# Altium PCB BMS.PcbDoc
Units mil, origin at the board's own origin, x right, y up, seen from the top; angles counter-clockwise.
Board outline 2559.06 x 2165.35 mil, 2 copper layers (Top Layer, Bottom Layer); 67 components, 40 nets, 172 pads, 236 vias.
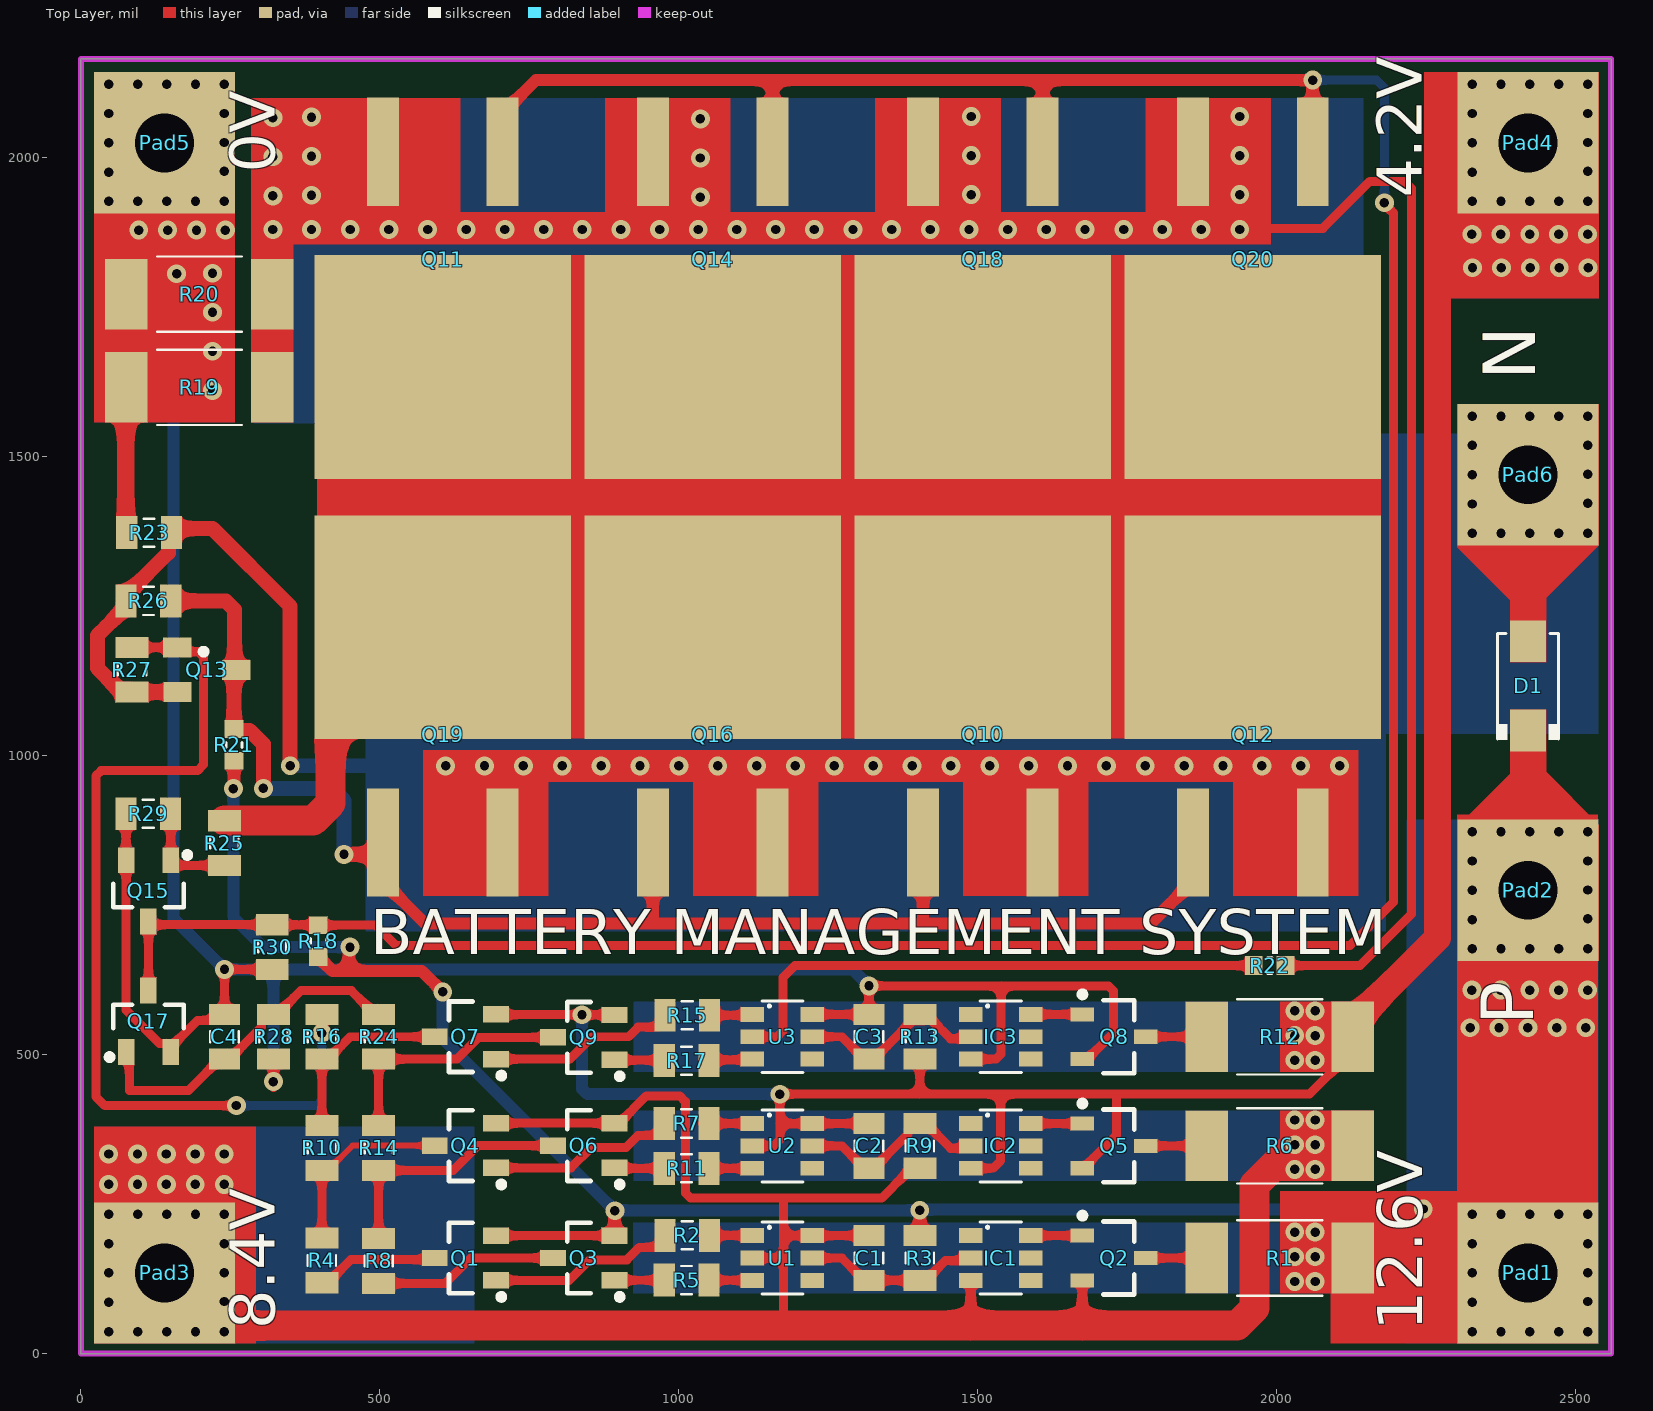
[diagram p0: Top Layer view]
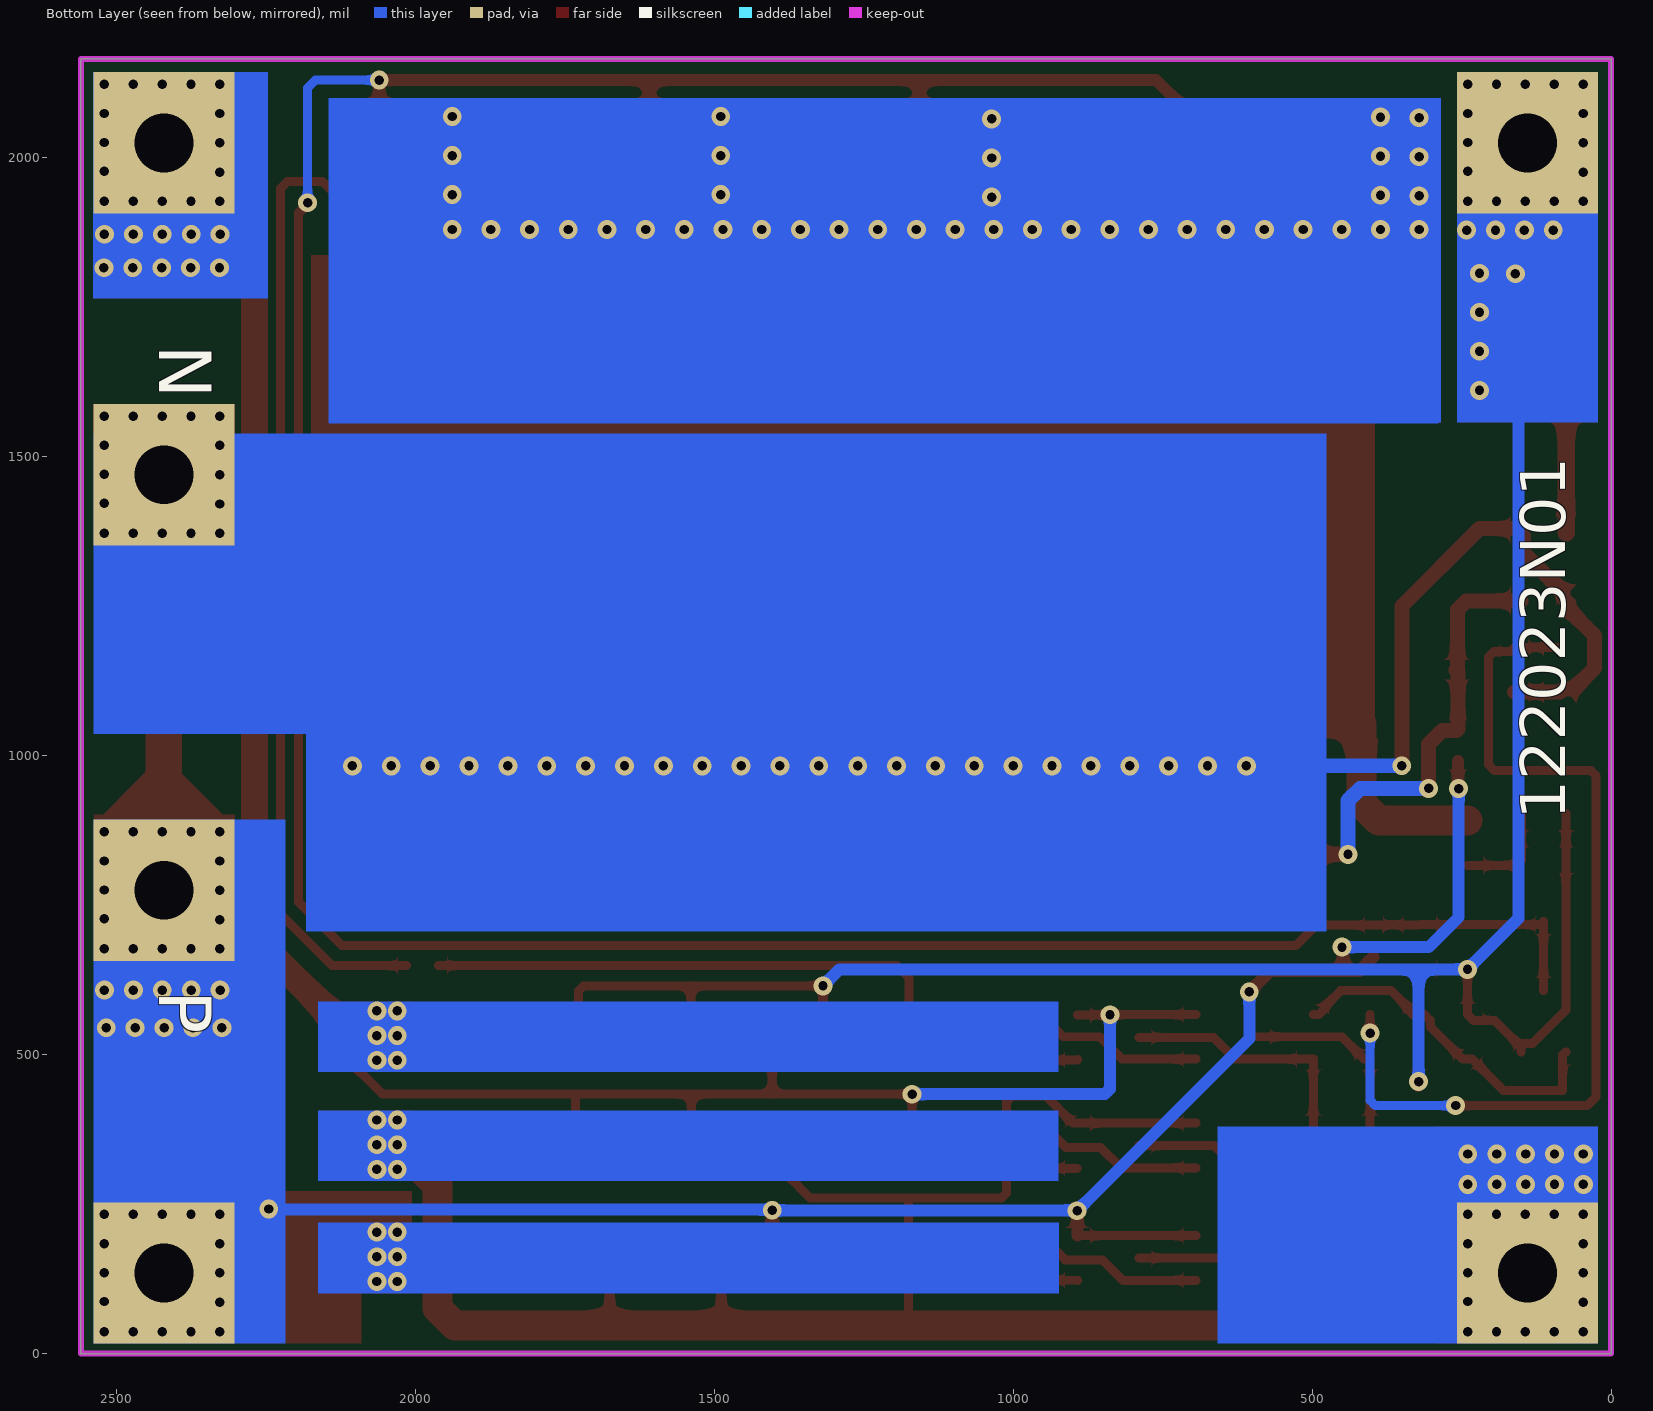
[diagram p1: Bottom Layer view, seen from below]
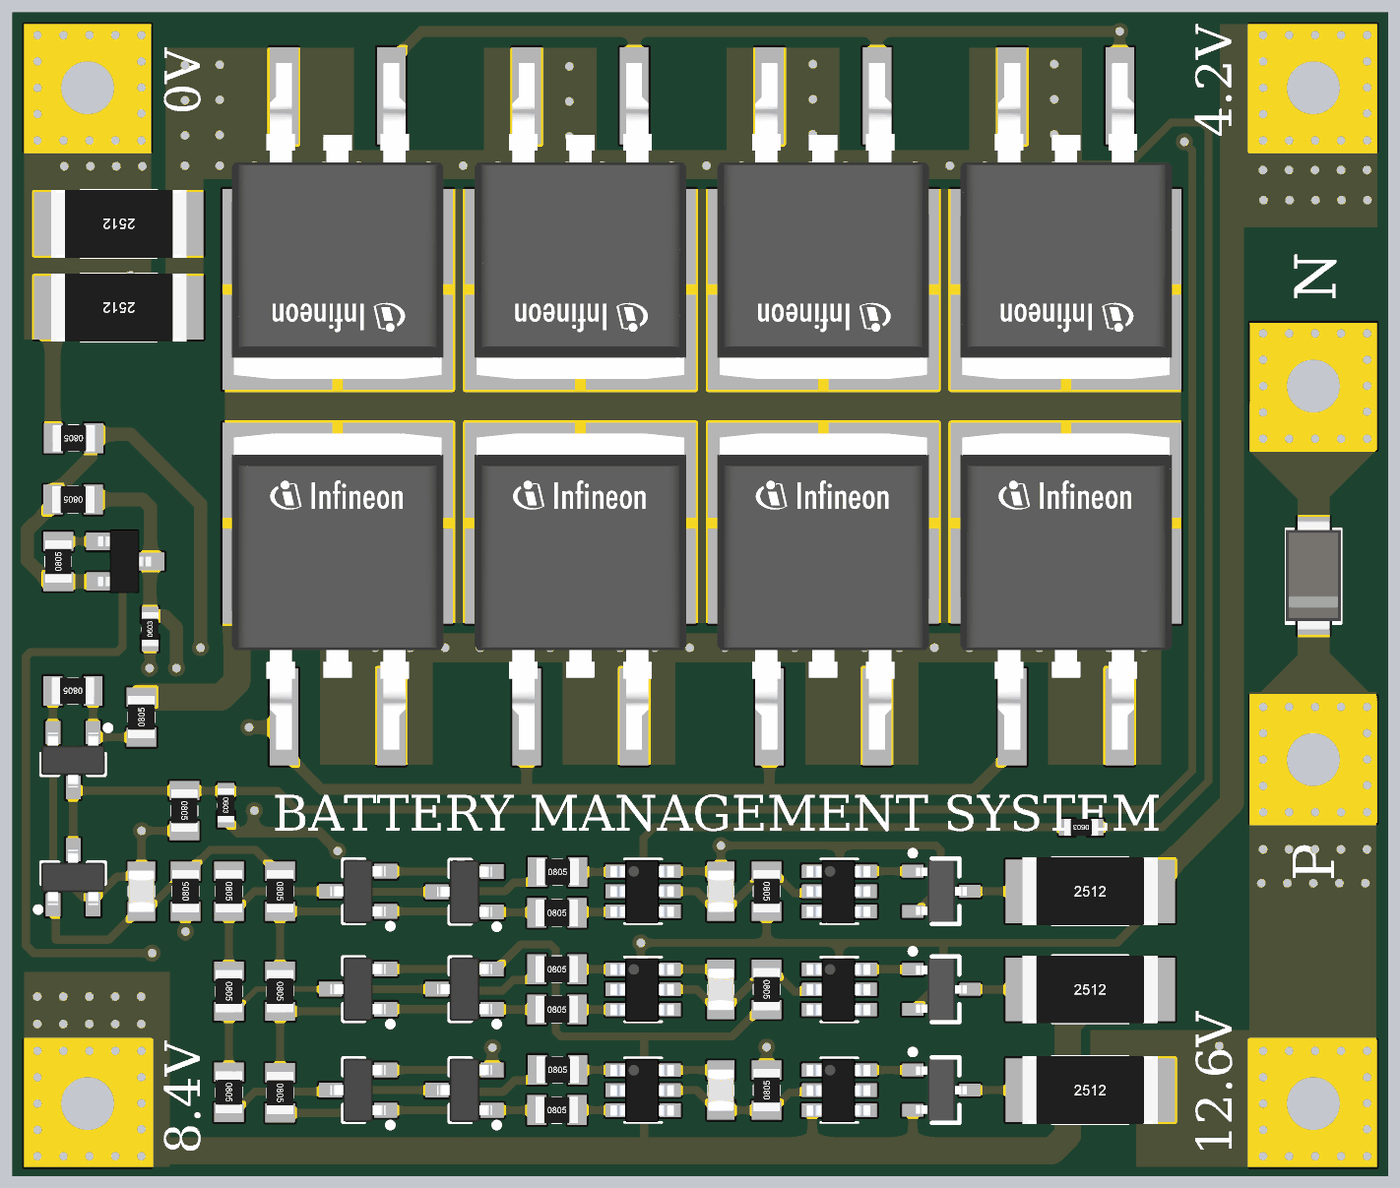
[diagram p2: 3D render of the assembled board from above, using the file's embedded part models]

## Layer stack, top to bottom
Top Solder: solder mask 0.4, Solder Resist, Dk 3.5
Top Layer: signal copper 1.4
Dielectric 1: dielectric 12.6, FR-4, Dk 4.8
Bottom Layer: signal copper 1.4
Bottom Solder: solder mask 0.4, Solder Resist, Dk 3.5

## Board outline
0,0 0,2165.35 2559.06,2165.35 2559.06,0

## Design rules (kind name [scope] priority, off if disabled: settings)
Clearance [All] p1: gap=10 ignorepadtopadclearanceinfootprint=TRUE
PolygonConnect [All] p1: connectstyle=Relief reliefconductorwidth=10 reliefentries=4 polygonreliefangle="90 Angle" airgapwidth=10
RoutingVias [All] p1: holewidth=28 width=50 viastyle="Through Hole" minholewidth=15.75 minwidth=31.5 maxholewidth=28 maxwidth=50
SolderMaskExpansion [All] p1: expansion=4 istentingtop=FALSE
Width [All] p1: maxlimit=100 minlimit=8 preferedwidth=10
30 further rules are at their usual default settings.

## Components (designator, comment, footprint, x,y, rotation, side; value= is the part's Value field where it differs from the comment)
C1 "100nF_0805" "CN-SMD-0805 - H32" 1318,160 r270 top
C2 "100nF_0805" "CN-SMD-0805 - H32" 1318,347.5 r270 top
C3 "100nF_0805" "CN-SMD-0805 - H32" 1318,530 r270 top
C4 "1uF_0805" "CN-SMD-0805 - H50" 240.15,530 r90 top
D1 "1N5822-SS34" SMA 2425,1120 r270 top value=1N5007
IC1 "HY2213_BB3A_SOT236" SOT23-6 1503.75,220.04 r270 top
IC2 "HY2213_BB3A_SOT236" SOT23-6 1503.75,407.54 r270 top
IC3 "HY2213_BB3A_SOT236" SOT23-6 1503.75,590.04 r270 top
Pad1 "Pad_Cell" Pad_cell 2420,135 r0 top
Pad2 "Pad_Cell" Pad_cell 2420,775 r0 top
Pad3 "Pad_Cell" Pad_cell 140,135 r0 top
Pad4 "Pad_Cell" Pad_cell 2420,2025 r0 top
Pad5 "Pad_Cell" Pad_cell 140,2025 r0 top
Pad6 "Pad_Cell" Pad_cell 2420,1470 r0 top
Q1 "PNP_SOT23" SOT23_3 643,160 r180 top
Q2 "A2SHB_SOT23" SOT-23-3L 1728,160 r0 top
Q3 "PNP_SOT23" SOT23_3 841,160 r180 top
Q4 "PNP_SOT23" SOT23_3 643,348 r180 top
Q5 "A2SHB_SOT23" SOT-23-3L 1728,347.5 r0 top
Q6 "PNP_SOT23" SOT23_3 841,348 r180 top
Q7 "PNP_SOT23" SOT23_3 643,530 r180 top
Q8 "A2SHB_SOT23" SOT-23-3L 1728,530 r0 top
Q9 "PNP_SOT23" SOT23_3 841,529 r180 top
Q10 "IRF1404S_DDPAK" TO263-3_DDPAK 1408.33,854.76 r0 top
Q11 "IRF1404S_DDPAK" TO263-3_DDPAK 705,2010.24 r180 top
Q12 "IRF1404S_DDPAK" TO263-3_DDPAK 1860,854.76 r0 top
Q13 "C1815" SOT23B 210.41,1143.73 r270 top
Q14 "IRF1404S_DDPAK" TO263-3_DDPAK 1156.67,2010.24 r180 top
Q15 "NPN_SOT23" SOT23_3 113,774 r270 top
Q16 "IRF1404S_DDPAK" TO263-3_DDPAK 956.67,854.76 r0 top
Q17 "NPN_SOT23" SOT23_3 113,556 r90 top
Q18 "IRF1404S_DDPAK" TO263-3_DDPAK 1608.33,2010.24 r180 top
Q19 "IRF1404S_DDPAK" TO263-3_DDPAK 505,854.76 r0 top
Q20 "IRF1404S_DDPAK" TO263-3_DDPAK 2060,2010.24 r180 top
R1 "470R_2512" RES-SMD-2512 2005,160 r0 top
R2 "10K_0805" RES-SMD-0805 1014,198 r0 top
R3 "100R_0805" RES-SMD-0805 1403.03,160 r90 top
R4 "1M_0805" RES-SMD-0805 403,156 r270 top
R5 "10K_0805" RES-SMD-0805 1013,123 r0 top
R6 "470R_2512" RES-SMD-2512 2005,347.5 r0 top
R7 "10K_0805" RES-SMD-0805 1013,385 r0 top
R8 "1M_0805" RES-SMD-0805 498,155 r270 top
R9 "100R_0805" RES-SMD-0805 1403.03,347.5 r270 top
R10 "1M_0805" RES-SMD-0805 403,344 r270 top
R11 "10K_0805" RES-SMD-0805 1013,310 r0 top
R12 "470R_2512" RES-SMD-2512 2005,530 r0 top
R13 "100R_0805" RES-SMD-0805 1403.03,530 r270 top
R14 "1M_0805" RES-SMD-0805 498,344 r270 top
R15 "10K_0805" RES-SMD-0805 1014,566 r0 top
R16 "1M_0805" RES-SMD-0805 403,530 r270 top
R17 "10K_0805" RES-SMD-0805 1013,490 r0 top
R18 "33K_0603" RES-SMD-0603 397,690 r270 top
R19 "R020_2512" RES-SMD-2512 198,1616 r180 top
R20 "R020_2512" RES-SMD-2512 198,1772 r180 top
R21 "33K_0603" RES-SMD-0603 256,1018 r90 top
R22 "1K_0603" RES-SMD-0603 1988,649 r180 top
R23 "100K_0805" RES-SMD-0805 114,1373 r180 top
R24 "1M_0805" RES-SMD-0805 498,530 r270 top
R25 "1M_0805" RES-SMD-0805 240,854 r90 top
R26 "1M_0805" RES-SMD-0805 112.97,1258.91 r180 top
R27 "1M_0805" RES-SMD-0805 85.41,1143.73 r90 top
R28 "1M_0805" RES-SMD-0805 322.15,530 r90 top
R29 "1M_0805" RES-SMD-0805 112.6,903 r180 top
R30 "1M_0805" RES-SMD-0805 320,680 r270 top
U1 "DW01_SOT236" SOT23-6 1138.75,220.04 r270 top
U2 "DW01_SOT236" SOT23-6 1138.75,407.54 r270 top
U3 "DW01_SOT236" SOT23-6 1138.75,590.04 r270 top

## Footprints (in the part's own frame and the unit in brackets; to place one, negate y for a bottom-side part, rotate by r counter-clockwise, add the part's x,y. Pads: shape width x height; smd on the part's side, far side on the other; paste and mask are expansions set on the pad)
"CN-SMD-0805 - H32" [mm]
  rect 0.9x1.3 smd: 1(-0.95,0) 2(0.95,0)
  silkscreen extent -0.23,-0.6 0.23,0.6, body extent -1,-0.63 1,0.63, height 0.81
"CN-SMD-0805 - H50" [mm]
  rect 0.9x1.3 smd: 1(-0.95,0) 2(0.95,0)
  silkscreen extent -0.23,-0.6 0.23,0.6, body extent -1,-0.63 1,0.63, height 1.26
Pad_cell [mm]
  rect 6x6 hole 2.5: 1(0,0)
RES-SMD-0603 [mm]
  rect 0.75x0.8 smd: 1(-0.675,0) 2(0.675,0)
  silkscreen extent -0.1,-0.34 0.1,0.34, body extent -0.8,-0.4 0.8,0.4, height 0.43
RES-SMD-0805 [mm]
  rect 0.9x1.4 smd: 1(-0.95,0) 2(0.95,0)
  silkscreen extent -0.23,-0.6 0.23,0.6, body extent -1,-0.63 1,0.63, height 0.6
RES-SMD-2512 [mm] "Chip Capacitor, Body 3.2x2.5mm, IPC Medium Density"
  rect 1.8x3 smd: 1(-3.1,0) 2(3.1,0)
  silkscreen extent -1.8,-1.6 1.8,1.6, body extent -3.2,-1.6 3.2,1.6, height 0.6
SMA [mil]
  rect 70x60 smd: 1(-71.57,-4.72) 2(78.03,-4.72)
  silkscreen extent -85,-56 94,47, body extent -100,-56 105,46, height 95
SOT23-6 [mm]
  rect 0.635x1 smd: 1(0.575,-0.4) 2(1.525,-0.4) 3(2.475,-0.4) 4(2.475,2.15) 5(1.525,2.15) 6(0.575,2.15)
  silkscreen extent 0,0 3.05,1.75, body extent 0.04,-0.67 3.04,2.33, height 1.3
SOT23_3 [mm] "SOT23, 3-Leads, Body 2,90x2,30mm, Pitch 0,95mm, IPC Medium Density"
  rect 1.1x0.7 smd: 1(-1.3,0.95) 2(-1.3,-0.95) 3(1.3,0)
  silkscreen extent -1.65,-1.5 0.7,1.78, body extent -1.3,-1.5 1.3,1.5, height 1.1
SOT23B [mm] "SOT 23B"
  rect 0.85x1.2 smd: 1(0.94,-1.245) 2(0,1.25) 3(-0.95,-1.25)
  silkscreen extent -0.9,-0.26 -0.65,-0.01, body extent -1.5,-1.3 1.5,1.2, height 1.06
SOT-23-3L [mm]
  rect 1x0.6 smd: 1(-1.35,0.95) 2(1.35,0) 3(-1.35,-0.95)
  silkscreen extent -1.47,-1.55 0.85,1.92, body extent -1.2,-1.45 1.2,1.45, height 1
TO263-3_DDPAK [mm]
  rect 1.35x4.6 smd: 1(0,0) 3(5.08,0)
  rect 10.9x9.5 smd paste-2539.97: 2(2.54,9.15)
  body extent -2.46,-1.56 7.54,13.39, height 4.41

## Part data
C1 C2 C3: library part "CAP 0805 104", "Cap SMD, 0.08x0.05 inch, 2.0x1.2 mm - 2012"
C4: library part "CAP 0805 105", "Cap SMD, 0.08x0.05 inch, 2.0x1.2 mm - 2012"
D1: library part "Diode 1N5822 SS34", "Schottky diode, 3A, VRRM 40V", Code - JEDEC=DO-214-AB, Published=8-Jun-2000, Publisher="Altium Limited", Revision="July-2002: Re-released for DXP Platform."
IC1 IC2 IC3: library part HY2213, "1  Cell  Li-ion/Polymer  Battery  Charge  Balance  IC"
Pad1 Pad2 Pad3 Pad4 Pad5 Pad6: library part Pad_cell
Q1 Q3 Q4 Q6 Q7 Q9: library part MMBT5401, "Transistor SMD MMBT5401 PNP 150V - SOT23"
Q2 Q5 Q8: library part HNM2302ALB, "N-Channel / Enhancement Mode / Field Effect Transistor"
Q10 Q11 Q12 Q14 Q16 Q18 Q19 Q20: library part IRF1404S, "IRF1404S TO263 MOSFET N-CH 162A 40V"
Q13: library part "Transistor C1815", "NPN 600mW, ECB"
Q15 Q17: library part MMBT5551, "2N5551 MMBT5551 G1 NPN Transistor 0.6A 160V SOT-23"
R1 R6 R12: library part "RES 2512 470R", "Resistor SMD, 0.25x0.12 inch, 6.3x3.2 mm - 6332, 1W"
R2 R5 R7 R11 R15 R17: library part "RES 0805 10K", "Resistor SMD, 0.08x0.05 inch, 2.0x1.2 mm - 2012, 1/8W"
R3 R9 R13: library part "RES 0805 100R", "Resistor SMD, 0.08x0.05 inch, 2.0x1.2 mm - 2012, 1/8W"
R4 R8 R10 R14 R16 R24 R25 R26 R27 R28 R29 R30: library part "RES 0805 1M", "Resistor SMD, 0.08x0.05 inch, 2.0x1.2 mm - 2012, 1/8W"
R18 R21: library part "RES 0603 33K", "Resistor SMD, 0.06x0.03 inch, 1.55x0.85 mm - 1608, 1/10W"
R19 R20: library part "RES 2512 0.02R", "Resistor SMD, 0.25x0.12 inch, 6.3x3.2 mm - 6332, 1W"
R22: library part "RES 0603 1K", "Resistor SMD, 0.06x0.03 inch, 1.55x0.85 mm - 1608, 1/10W"
R23: library part "RES 0805 100K", "Resistor SMD, 0.08x0.05 inch, 2.0x1.2 mm - 2012, 1/8W"
U1 U2 U3: library part DW01, "One Cell Lithium-ion/Polymer Battery Protection IC"

## Via types
v1: diameter 31.5, hole 15.75, Top Layer to Bottom Layer, tented both sides, 236 vias

## Nets (pads, with @x,y where several pads share a name; then routed paths per layer and width w, separated by ;. In a path a pad name is that pad's centre, name@x,y a point inside that pad or via, vN(x,y) a via of type N, cw(c..) or ccw(c..) an arc to the next point about the centre after c; other vN are vias at no path point)
0V: C3.1 C4.2 IC3.3 Pad5.1 Q8.3 Q15.2 Q17.2 R19.2 R20.2 R23.2 R28.1 R29.2 R30.2 U3.6 | length 4713.6
  Top Layer w15: R29.2 75.4,902.8 75.4,825.38 Q15.2 75.6,574.4 131.03,518.97 144.12,518.97 Q17.2@150.4,512.69 ; R19.2 151.4,1616 ; Q17.2 Q17.2@150.4,512.69 ; R30.2 247.77,642.6 244.54,639.37 244.54,638.25 240.15,633.85 C4.2 229.93,557.18 194.89,557.18 Q17.2@150.4,512.69 ; v1@322,445 322.15,445.15 R28.1 ; U3.6 C3.1 v1(1318,615) 1539,615 ; IC3.3 1530.21,492.6 1539,501.39 1539,615 ; Q8.3@1666.98,492.6 Q8.3 1682.72,492.6 1727,536.87 1727,606.21 1718.21,615 1539,615
  Top Layer w30: R23.2@75,1373 75,1772 75,1775.71 149.32,1850.03 ; 151.4,1616 151.4,1797.4 v1(160,1806)
  Bottom Layer w20: v1(220,1611) 201.56,1611 155,1564.44 155,727.75 v1(240.15,642.6) 322,642.6 ; v1(322,455) 322,642.6 ; v1(1318,615) 1290.4,642.6 322,642.6
  other v1: 220,1676.33 220,1741.67 220,1807 96.66,1879 145,1879 193.34,1879 241.69,1879 46.63,1927 94.97,1927 143.31,1927 191.66,1927 240,1927 46.63,1976 240,1977.25 46.63,2025 240,2025.5 46.63,2074 240,2074 46.63,2123 94.97,2123 143.31,2123 191.66,2123 240,2123
4.2V: C2.1 IC2.3 Pad4.1 Q5.3 Q7.2 Q9.2 R12.2 R13.2 U2.2 U2.6 | length 3947.5
  Top Layer w15: Q7.2 694.68,566.9 v1(838,566.9) 838.25,566.65 891.93,566.65 Q9.2 ; U2.2 1158.5,347.5 1169,358 1169,384.9 ; C2.1@1325.87,384.9 C2.1 U2.6 1169,384.9 ; R13.2 1403.03,434 ; IC2.3 1525.45,310.1 1538.12,322.77 1538.12,434 ; Q5.3@1666.98,310.1 Q5.3 1676.35,310.1 1732,365.75 1732,431.56 ; R12.2@2127.05,553.62 R12.2 2127.05,506.38 2054.67,434 1538.12,434 ; 1169,384.9 v1(1169,434) 1403.03,434 ; 1403.03,434 1538.12,434
  Top Layer w45: R12.2@2127.05,553.62 2268.84,695.41 2268.84,1873.84 Pad4.1
  Bottom Layer w20: v1(838,566.9) 838,442.79 846.79,434 v1(1169,434)
  other v1: 2030,490.66 2064,490.66 2030,532 2064,532 2030,573.34 2064,573.34 2327.31,1816 2375.66,1816 2424,1816 2472.34,1816 2520.69,1816 2326.31,1872 2374.66,1872 2423,1872 2471.34,1872 2519.69,1872 2326.63,1927 2374.97,1927 2423.31,1927 2471.66,1927 2520,1927 2326.63,1976 2520,1977.25 2326.63,2025 2520,2025.5 2326.63,2074 2520,2074 2326.63,2123 2374.97,2123 2423.31,2123 2471.66,2123 2520,2123
8.4V: C1.1 IC1.3 Pad3.1 Q2.3 Q4.2 Q6.2 R6.2 R9.2 U1.2 U1.6 | length 3740.4
  Top Layer w15: Q4.2 Q6.2 900.06,385.4 945.65,431 1001.21,431 1010.82,421.4 1010.82,268.79 1019.6,260 1176,260 ; U1.2 1175.19,160 ; 1159.92,40 1166.92,47 1175.19,55.27 1175.19,160 ; C1.1 U1.6 1175.19,197.4 ; R9.2 1392.82,299.88 1378.82,299.88 1338.94,260 1176,260 ; 1488,40 1488,47 IC1.3 ; 1674.85,40 1674.85,47 Q2.3 ; 1175.19,160 1175.19,197.4 ; 1175.19,197.4 1175.19,259.19 1176,260
  Top Layer w50: Pad3.1 228,47 240,47 1166.92,47 1488,47 1674.85,47 1933.71,47 1963,76.29 1963,282.5 v1(2030,349.5) ; 2064,325.16 2086.34,347.5 R6.2
  other v1: 46.63,37 94.97,37 143.31,37 191.66,37 240,37 46.63,86 240,87.25 46.63,135 240,135.5 46.63,184 240,184 46.63,233 94.97,233 143.31,233 191.66,233 240,233 46.31,283 94.66,283 143,283 191.34,283 239.69,283 2030,308.16 2064,308.16 46.31,334 94.66,334 143,334 191.34,334 239.69,334 2064,349.5 2030,390.84 2064,390.84
12.6V: D1.2 Pad1.1 Pad2.1 Q1.2 Q3.2 R1.2 R3.2 R18.2 R21.1 | length 3038
  Top Layer w15: Q1.2 Q3.2
  Top Layer w20: v1(255,945) 256,946 R21.1 ; R18.2 397.98,663.43 402.75,658.66 402.75,657.68 420.42,640 448.09,640 ; v1(450,680) 448.09,678.09 448.09,640 ; v1(605,605) 570,640 448.09,640 ; Q3.2 892.59,197.81 892.59,238.59 v1(893,239) ; R3.2 v1(1403,240) ; R1.2 2127.05,183.62 2152.48,209.06 2212.06,209.06 v1(2245,242)
  Bottom Layer w20: v1(255,945) 255,730 305,680 v1(450,680) ; v1(605,605) 605,527 v1(893,239) 893.5,239.5 1402.5,239.5 v1(1403,240) 1404,241 2244,241 v1(2245,242)
  other v1: 2326.63,37 2374.97,37 2423.31,37 2471.66,37 2520,37 2326.63,86 2520,87.25 2030,120.66 2064,120.66 2326.63,135 2520,135.5 2030,162 2064,162 2326.63,184 2520,184 2030,203.34 2064,203.34 2326.63,233 2374.97,233 2423.31,233 2471.66,233 2520,233 2323.31,545 2371.66,545 2420,545 2468.34,545 2516.69,545 2326.31,608 2374.66,608 2423,608 2471.34,608 2519.69,608 2326.63,677 2374.97,677 2423.31,677 2471.66,677 2520,677 2326.63,726 2520,727.25 2326.63,775 2520,775.5 2326.63,824 2520,824 2326.63,873 2374.97,873 2423.31,873 2471.66,873 2520,873
NetC1_2: C1.2 IC1.2 R3.1 U1.5 | length 295.6
  Top Layer w15: U1.5 1272.72,160 1310.13,122.6 C1.2 R3.1 1412.87,122.6 1445.81,155.54 1483.54,155.54 IC1.2
NetC2_2: C2.2 IC2.2 R9.1 U2.5 | length 330.6
  Top Layer w15: U2.5 1272.72,347.5 1310.13,310.1 C2.2 C2.2@1325.87,310.1 ; C2.2@1326.1,310.1 1326.1,310.32 1336.09,320.32 1336.32,320.32 1382.97,366.97 1382.97,374.68 1388.41,380.12 1417.66,380.12 1454.6,343.17 1483.68,343.17 IC2.2
NetC3_2: C3.2 IC3.2 R13.1 U3.5 | length 331.3
  Top Layer w15: U3.5 1272.72,530 1310.13,492.6 1325.87,492.6 1389.53,556.25 R13.1@1409.41,556.25 ; R13.1 1413.25,557.18 1423.82,557.18 1454.6,526.4 1484.4,526.4 IC3.2
NetC4_1: C4.1 Q17.1 R24.1 R28.2 | length 580.2
  Top Layer w15: Q17.1 81,499.42 81,440 179.68,440 232.27,492.6 C4.1 248.02,492.6 302.09,546.67 302.09,557.18 312.31,567.4 331.99,567.4 342.21,577.62 342.21,581.39 367.81,607 452.34,607 477.94,581.39 477.94,577.62 488.16,567.4 R24.1
NetD1_1: D1.1 Pad6.1 Q10.3 Q12.3 Q13.1 Q16.3 Q19.3 R23.1 R26.2 R27.1 | length 1213.3
  Top Layer w25: R27.1@85.21,1106.53 161.21,1106.53 Q13.1 ; R27.1 80.19,1111.55 62.64,1111.55 27.5,1146.69 27.5,1201.17 42.14,1215.82 42.32,1215.82 70.35,1243.85 70.35,1253.69 80.78,1264.13 80.78,1273.97 146.18,1339.37 146.18,1367.78 R23.1 158.4,1380 220,1380 350,1250 v1(350,983.25)
  Bottom Layer w15: v1@607,980 v1(610,983)
  Bottom Layer w25: v1(350,983.25) 603.75,983.25 v1@607,980
  other v1: 675,983 740,983 805,983 870,983 935,983 1000,983 1065,983 1130,983 1195,983 1260,983 1325,983 1390,983 1455,983 1520,983 1585,983 1650,983 1715,983 1780,983 1845,983 1910,983 1975,983 2040,983 2105,983 2326.63,1372 2374.97,1372 2423.31,1372 2471.66,1372 2520,1372 2326.63,1421 2520,1422.25 2326.63,1470 2520,1470.5 2326.63,1519 2520,1519 2326.63,1568 2374.97,1568 2423.31,1568 2471.66,1568 2520,1568
NetIC1_6: IC1.6 Q2.1 | length 86.5
  Top Layer w15: IC1.6 Q2.1
NetIC2_6: IC2.6 Q5.1 | length 86.5
  Top Layer w15: IC2.6 Q5.1
NetIC3_6: IC3.6 Q8.1 | length 86.5
  Top Layer w15: IC3.6 Q8.1
NetQ1_1: Q1.1 R2.1 | length 319.4
  Top Layer w15: Q1.1 816.6,122.6 851,157 913,157 933.94,177.94 966.38,177.94 976.6,188.16 R2.1
NetQ1_3: Q1.3 R4.2 | length 206
  Top Layer w15: R4.2 412.84,118.6 451.43,157.18 589,157.18 Q1.3
NetQ2_2: Q2.2 R1.1 | length 101.8
  Top Layer w15: Q2.2 R1.1
NetQ3_1: Q3.1 R5.1 | length 87.4
  Top Layer w15: Q3.1 892.38,122.8 R5.1@979.22,122.8 ; R5.1@986.22,122.8 R5.1@986.43,123
NetQ3_3: Q3.3 R8.2 | length 309.4
  Top Layer w15: R8.2 609.6,117.6 652,160 Q3.3
NetQ4_1: Q4.1 R7.1 | length 318
  Top Layer w15: Q4.1 819.6,310.6 854,345 911.96,345 931.9,364.94 965.38,364.94 975.6,375.16 R7.1
NetQ4_3: Q4.3 R4.1 R10.2 | length 319.2
  Top Layer w10: R10.2 412.84,306.6 454.25,348 Q4.3
  Top Layer w15: R4.1 R10.2
NetQ5_2: Q5.2 R6.1 | length 101.8
  Top Layer w15: Q5.2 R6.1
NetQ6_1: Q6.1 R11.1 | length 82.8
  Top Layer w15: Q6.1@892.78,310 R11.1
NetQ6_3: Q6.3 R8.1 R14.2 | length 428.2
  Top Layer w15: R8.1@498,187.4 R8.1 R14.2 622.6,306.6 664,348 Q6.3
NetQ7_1: Q7.1 R15.1 | length 318.2
  Top Layer w15: Q7.1 817.6,492.6 855,530 915.96,530 931.9,545.94 966.38,545.94 976.34,555.9 R15.1@976.34,565.74
NetQ7_3: Q7.3 R10.1 R16.2 | length 315.5
  Top Layer w15: R10.1 R16.2 412.84,492.6 450.25,530 Q7.3
NetQ8_2: Q8.2 R12.1 | length 101.8
  Top Layer w15: Q8.2 R12.1
NetQ9_1: Q9.1 R17.1 | length 87.9
  Top Layer w15: Q9.1 892.98,490.8 R17.1@978.63,490.8 ; R17.1@985.63,490.8 R17.1@986.43,490
NetQ9_3: Q9.3 R14.1 R24.2 | length 418.1
  Top Layer w15: R14.1 R24.2 628.6,492.6 665,529 Q9.3
NetQ10_1: Q10.1 Q12.1 Q13.2 Q16.1 Q19.1 R21.2 R26.1 | length 2563.2
  Top Layer w15: 953.98,719.5 956.48,719.5 956.67,719.69 ; Q12.1@1860,790.79 Q12.1
  Top Layer w20: Q19.1 505,835 521.58,818.43 521.58,773.42 575.31,719.69 956.67,719.69 Q16.1 ; 956.67,719.5 1408.33,719.5 1788.71,719.5 Q12.1@1860,790.79 ; 1408.33,719.69 Q10.1
  Top Layer w25: R26.1 242.32,1258.91 256.96,1244.26 256.96,1146.39 Q13.2 256,1140.11 R21.2 258.26,1042.31 282.21,1042.31 305,1019.52 305,945.28 v1(305.28,945.28) ; v1(440,835) 503.11,835 Q19.1@505,833.11
  Bottom Layer w25: v1(305.28,945.28) 305.28,945 420,945 440,925 v1(440,835)
NetQ10_2: Q10.2 Q11.2 Q12.2 Q14.2 Q16.2 Q18.2 Q19.2 Q20.2 R25.2 | length 819.2
  Top Layer w50: R25.2 388.39,891.4 417.68,920.69 417.68,1052.99 579.69,1215 726.35,1215 Q19.2
NetQ11_1: Q11.1 Q14.1 Q15.3 Q17.3 Q18.1 Q20.1 R18.1 R30.1 | length 5537.9
  Top Layer w15: Q17.3 Q15.3@113,721.18 ; Q15.3 Q15.3@113,721.18 ; R18.1 396.59,716.99 320.41,716.99 R30.1 116.78,717.4 Q15.3@113,721.18 ; R18.1@397.98,716.57 493.43,716.57 527.75,682.25 2122.25,682.25 2195,755 2195,1907.71 2180,1922.71 v1(2180,1924.75)
  Top Layer w20: Q11.1 705,2074.21 760.79,2130 1156.67,2130 ; Q14.1 1156.67,2130 ; Q18.1 1608.33,2130 ; Q20.1 v1(2060,2130) 1608.33,2130 ; 1156.67,2130 1608.33,2130
  Bottom Layer w15: v1(2060,2130) 2167,2130 2180,2117 v1(2180,1924.75)
NetQ11_3: Q11.3 Q14.3 Q18.3 Q20.3 R19.1 R20.1 R22.1 | length 2506.3
  Top Layer w15: Q20.3 1869,2001.24 1869,1890 1870,1889 1938,1889 1945,1882 2077.17,1882 2155.67,1960.5 2213.28,1960.5 2225,1948.78 2225,735 2139,649 R22.1
  Top Layer w60: R19.1 R20.1 320.05,1925.05 405.15,2010.15 Q11.3@501.58,2010.15
  other v1: 321,1880 385.68,1880 450.36,1880 515.04,1880 579.72,1880 644.4,1880 709.08,1880 773.76,1880 838.44,1880 903.12,1880 967.8,1880 1032.48,1880 1097.16,1880 1161.84,1880 1226.52,1880 1291.2,1880 1355.88,1880 1420.56,1880 1485.24,1880 1549.92,1880 1614.6,1880 1679.28,1880 1743.96,1880 1808.64,1880 1873.32,1880 1938,1880 1036,1934.33 321,1936.33 385.68,1937.33 1489,1938.33 1938,1938.33 1036,1999.67 321,2001.67 385.68,2002.67 1489,2003.67 1938,2003.67 1036,2065 321,2067 385.68,2068 1489,2069 1938,2069
NetQ13_3: Q13.3 R16.1 R27.2 | length 1561.8
  Top Layer w15: R27.2 Q13.3 168.35,1173.98 196.21,1173.98 205,1165.19 205,985 195,975 33.79,975 25,966.21 25,430 40,415 v1(260,415) ; v1(403,536.06) R16.1
  Bottom Layer w15: v1(260,415) 394.21,415 403,423.79 v1(403,536.06)
NetQ15_1: Q15.1 R25.1 R29.1 | length 161.3
  Top Layer w15: R29.1 150.2,902.8 150.2,825.38 Q15.1 ; Q15.1@156.68,816.6 R25.1
NetR2_2: R2.2 U1.1 | length 82.7
  Top Layer w15: R2.2@1040.57,198 1040.87,197.7 1122.7,197.7 U1.1
NetR5_2: R5.2 U1.3 | length 83.6
  Top Layer w15: R5.2@1039.57,123 1039.78,122.8 1122.8,122.8 U1.3
NetR7_2: R7.2 U2.1 | length 83.5
  Top Layer w15: R7.2@1039.58,385 1039.62,384.95 1122.95,384.95 U2.1
NetR11_2: R11.2 U2.3 | length 71.9
  Top Layer w15: R11.2@1039.57,300 R11.2@1039.62,300.05 ; R11.2 U2.3@1122.26,310
NetR15_2: R15.2 U3.1 | length 83
  Top Layer w15: R15.2@1040.57,566 1121.6,566 U3.1
NetR17_2: R17.2 U3.3 | length 84.5
  Top Layer w15: R17.2@1039.57,490 1040.87,491.3 1121.7,491.3 U3.3
NetR22_2: R22.2 U3.2 | length 940
  Top Layer w15: U3.2 1164.21,530 1174,539.79 1174,629 1194,649 R22.2
pads on no net: IC1.1 IC1.4 IC1.5 IC2.1 IC2.4 IC2.5 IC3.1 IC3.4 IC3.5 U1.4 U2.4 U3.4

## Keep-outs
Keep-Out Layer:
  the board outline again, w10

## Other copper
Top Layer:
  rectangle net 8.4V: 21.89,16.89 293,380
  rectangle net 4.2V: 2005,470.94 2162.48,589
  rectangle net 12.6V: 2005,100.94 2162.48,219
  rectangle net 8.4V: 2005,288.44 2162.48,406.5
  rectangle net 4.2V: 2246,1765 2539.11,2143.11
  rectangle net 12.6V: 2301.34,25.12 2537.56,901.34
  rectangle net 0V: 22,1556.94 258.11,2143.11
  rectangle net NetQ11_3: 289,1855 635,2100
  rectangle net NetQ11_3: 284.61,1556.94 355.48,2100
  rectangle net 12.6V: 2005,164 2363,272
  rectangle net NetD1_1: 1023.52,765 1233.52,1010
  rectangle net NetD1_1: 1475.18,765 1685.18,1010
  rectangle net NetD1_1: 1926.85,765 2136.85,1010
  rectangle net NetD1_1: 571.85,765 781.85,1010
  rectangle net NetD1_1: 571.85,956 2136.85,1010
  rectangle net NetQ11_3: 425,1855 1990,1909
  rectangle net NetQ11_3: 1780,1855 1990,2100
  rectangle net NetQ11_3: 1328.33,1855 1538.33,2100
  rectangle net NetQ11_3: 876.67,1855 1086.67,2100
  rectangle net 12.6V: 2090,16.89 2536.5,219.85
  rectangle net NetQ10_2: 395,1029 2174,1837
  region net 12.6V: 2390.28,1076.97 2390.28,969.49 2302.44,881.65 2302.44,656.89 2538.66,656.89 2538.66,884.88 2450.28,973.27 2450.28,1076.97
  region net NetD1_1: 2450.28,1156.57 2450.28,1264.05 2538.11,1351.89 2538.11,1588.11 2301.89,1588.11 2301.89,1348.66 2390.28,1260.28 2390.28,1156.57
Bottom Layer:
  rectangle net 12.6V: 923,100.94 2162.48,219
  rectangle net 8.4V: 924,288.44 2162.48,406.5
  rectangle net 4.2V: 924,470.94 2162.48,589
  rectangle net 4.2V: 2246,1765 2539.11,2143.11
  rectangle net 8.4V: 21.89,16.89 658,380
  rectangle net 12.6V: 2217,16.89 2538.11,893.11
  rectangle net NetD1_1: 476,706 2183,1287
  rectangle net NetD1_1: 476,1036 2538.11,1539
  rectangle net 0V: 22,1556.94 258.11,2143.11
  rectangle net NetQ11_3: 284.61,1556.94 355.48,2100
  rectangle net NetQ11_3: 289,1556 2145,2100

## Silkscreen, mask and mechanical layers (free items; w line width, h text height)
Top Overlay:
  text "0V" at 349.04,1975.12 h130 r90
  text "4.2V" at 2267.32,1933 h130 r90
  text "N" at 2461.14,1628 h150 r90
  text "BATTERY MANAGEMENT SYSTEM" at 484,642.96 h130
  text "P" at 2458.14,549 h150 r90
  text "8.4V" at 349.04,41 h130 r90
  text "12.6V" at 2268.04,38 h130 r90
Bottom Overlay:
  text "N" at 2457.14,1687 h150 r90
  text "122023N01" at 51.96,893 h130 r270
  text "P" at 2457.14,608 h150 r90